# Altium PCB curr_sens_pcb.PcbDoc
Units mil, origin at the board's own origin, x right, y up, seen from the top; angles counter-clockwise.
Board outline 1595 x 1645 mil, 2 copper layers (Top Layer, Bottom Layer); 23 components, 13 nets, 102 pads, 31 vias.
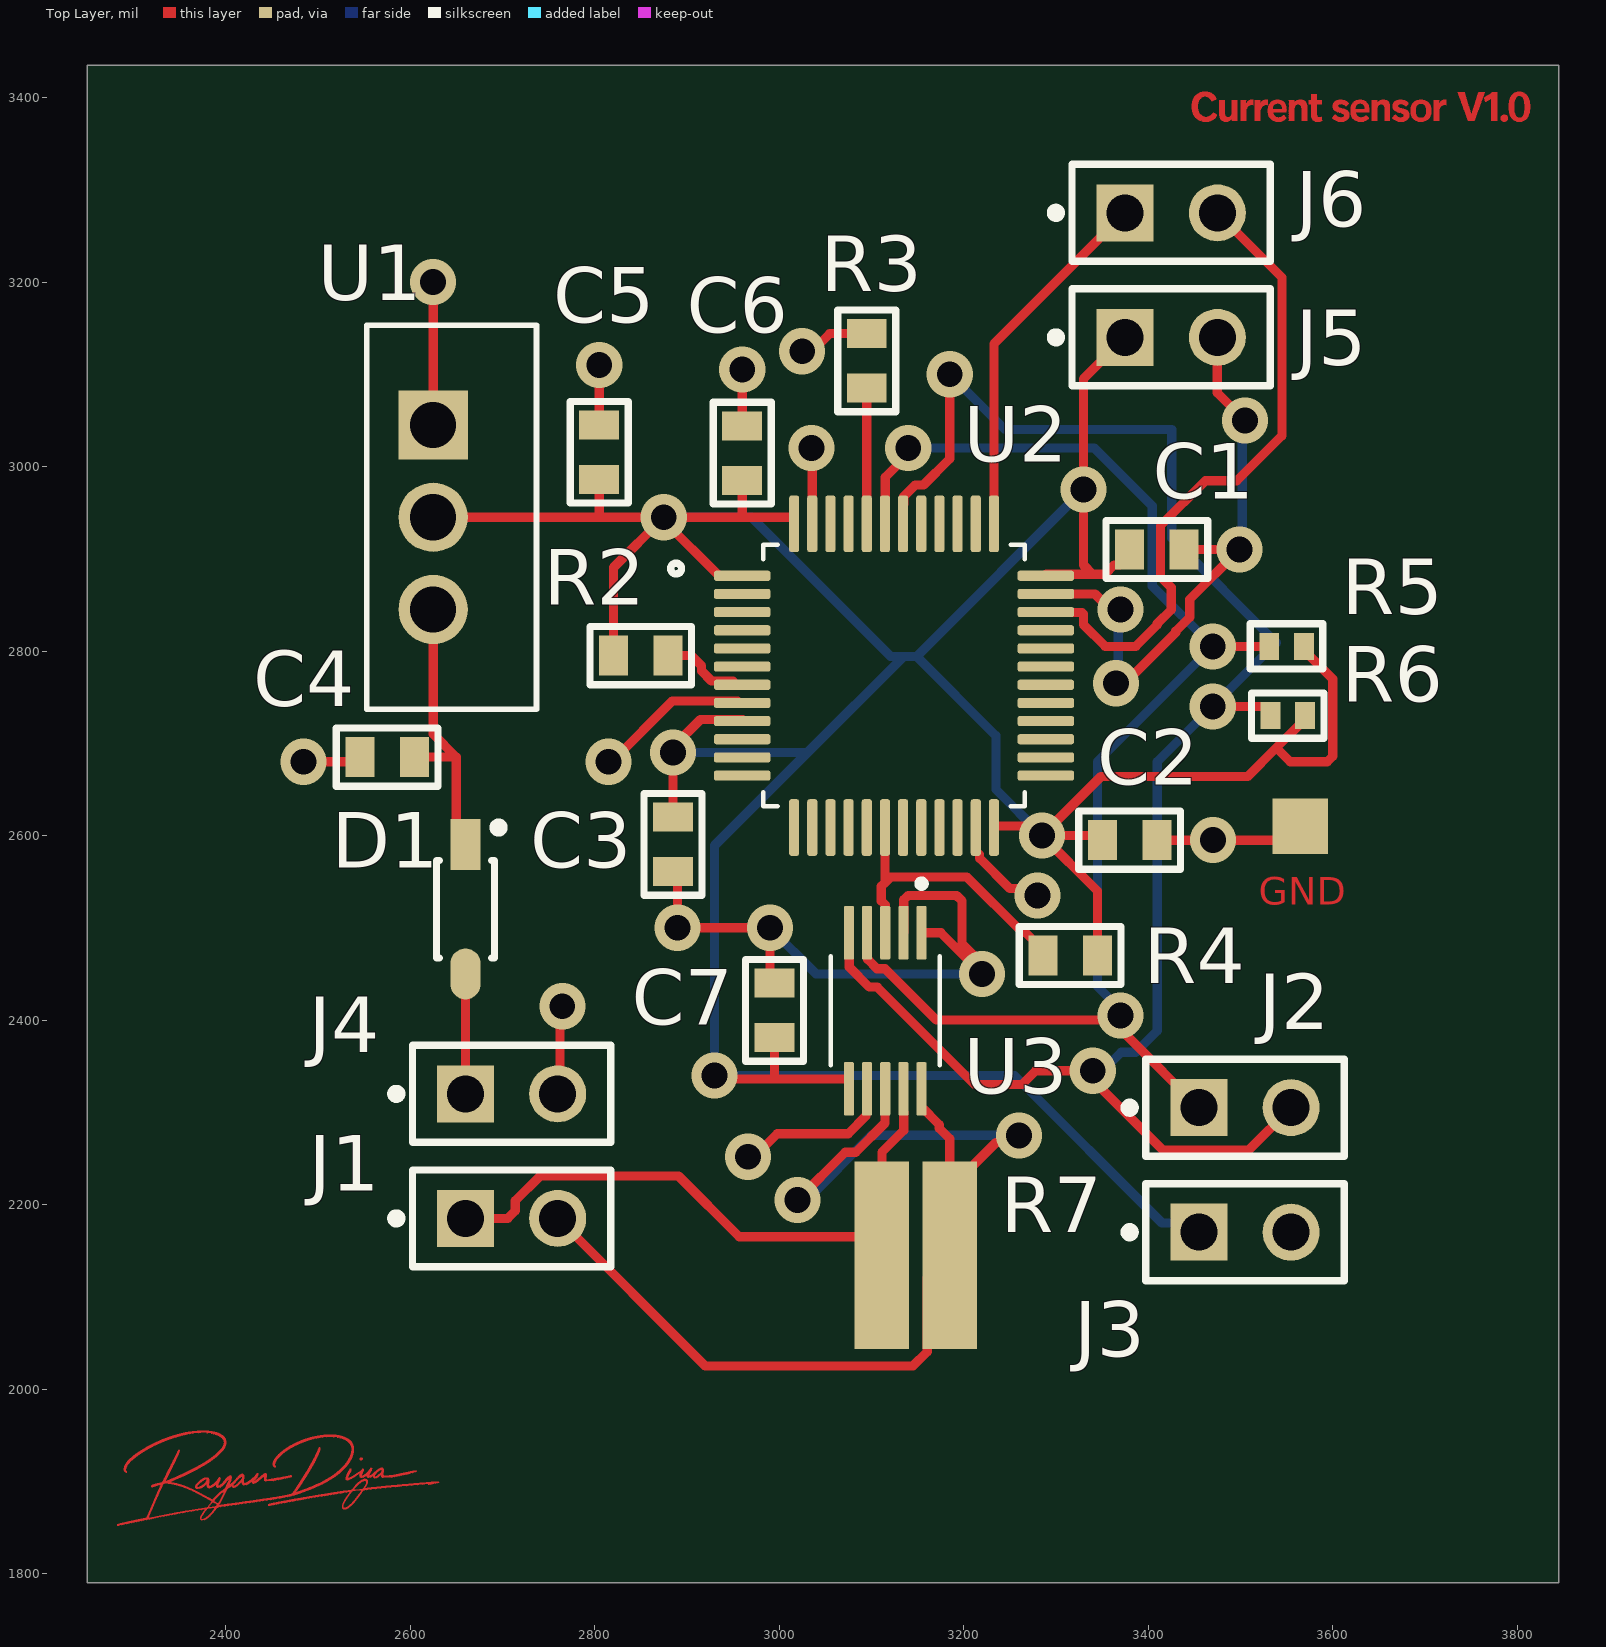
[diagram p0: Top Layer view]
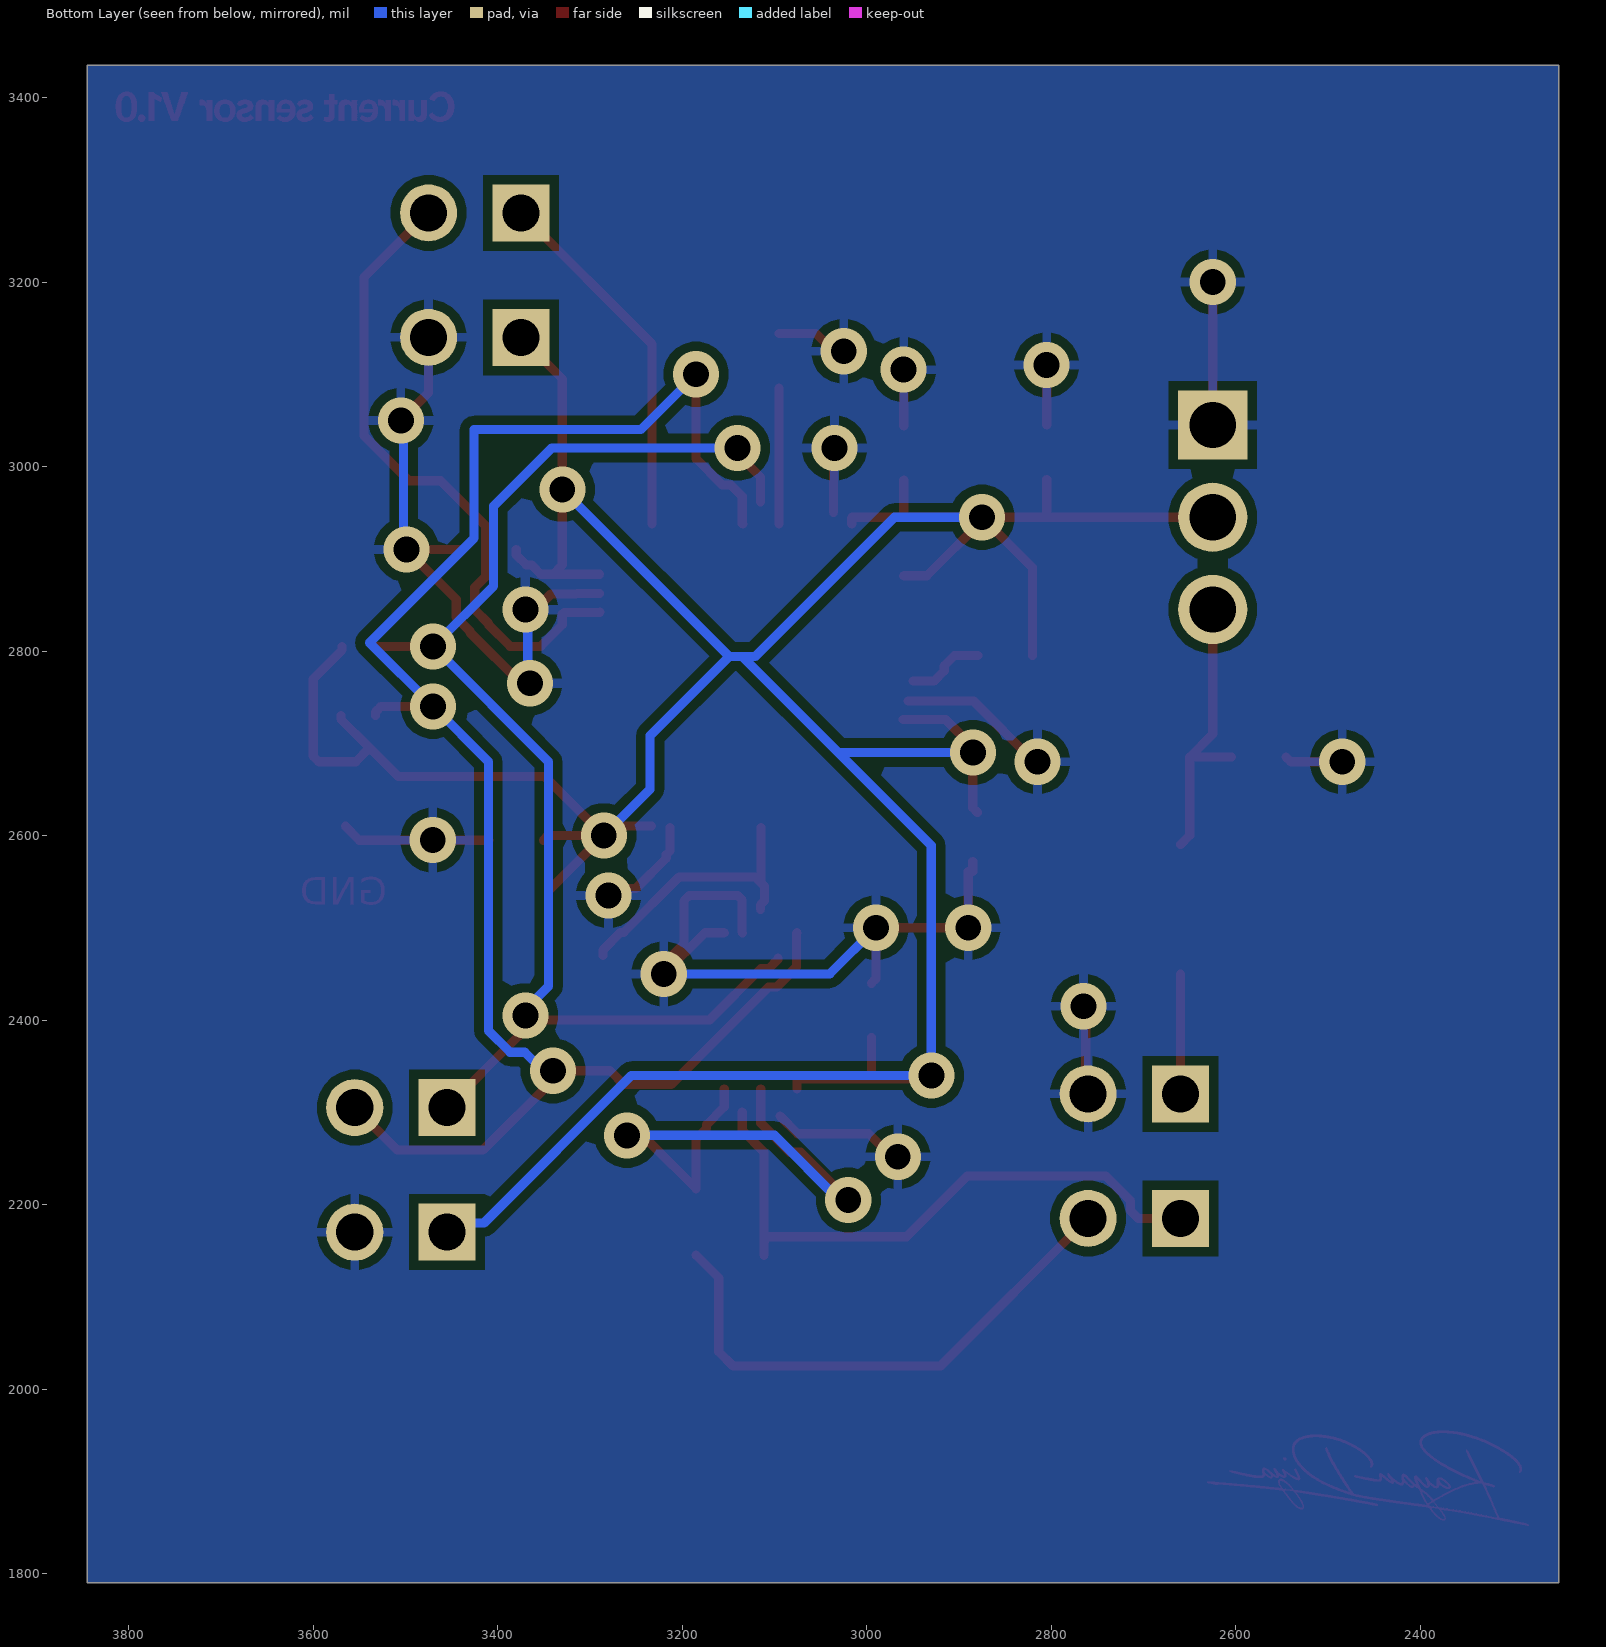
[diagram p1: Bottom Layer view, seen from below]
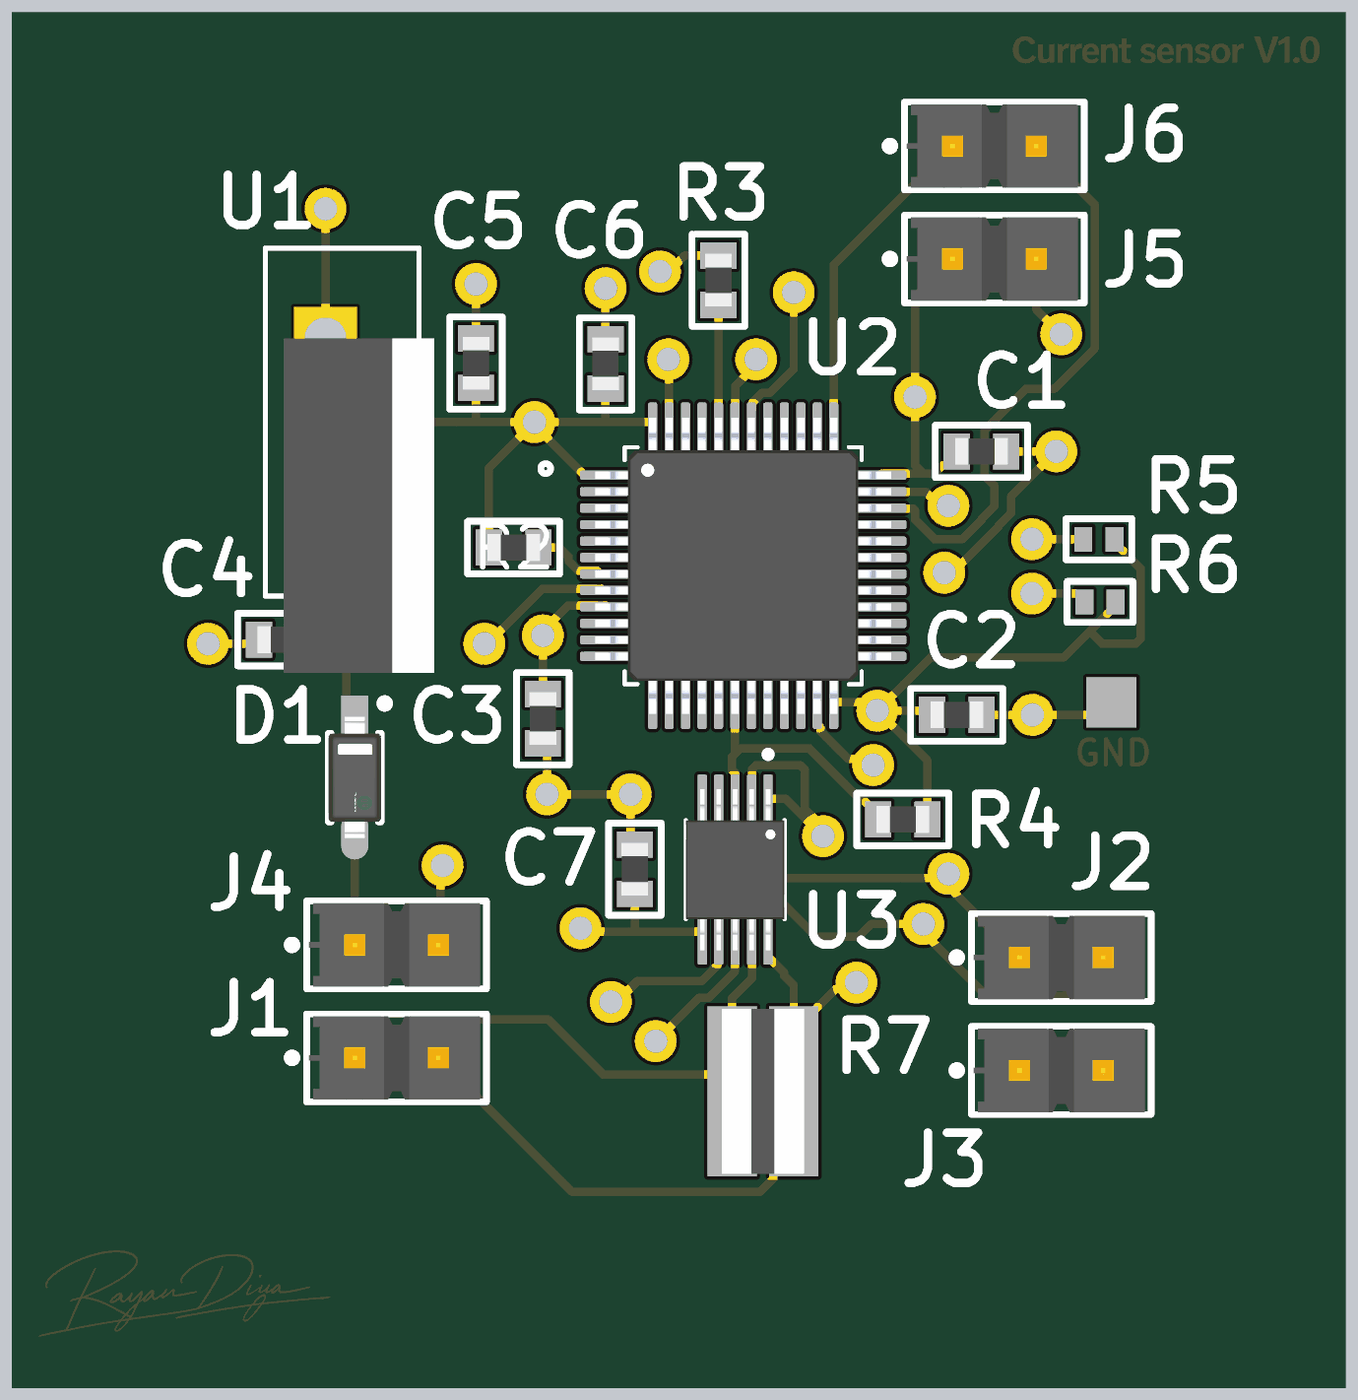
[diagram p2: 3D render of the assembled board from above, using the file's embedded part models]

## Layer stack, top to bottom
Top Solder: solder mask 0.4, Solder Resist, Dk 3.5
Top Layer: signal copper 1.4
Dielectric 1: dielectric 12.6, FR-4, Dk 4.8
Bottom Layer: signal copper 1.4
Bottom Solder: solder mask 0.4, Solder Resist, Dk 3.5

## Board outline
2250,1790 3845,1790 3845,3435 2250,3435

## Design rules (kind name [scope] priority, off if disabled: settings)
Clearance [All] p1: gap=10 ignorepadtopadclearanceinfootprint=TRUE except(5: Arc-SMDPad Track-SMDPad)
PolygonConnect [All] p1: connectstyle=Relief reliefconductorwidth=10 reliefentries=4 polygonreliefangle="90 Angle" airgapwidth=10
RoutingVias [All] p1: holewidth=28 width=50 viastyle="Through Hole" minholewidth=28 minwidth=50 maxholewidth=28 maxwidth=50
SolderMaskExpansion [All] p1: expansion=4 istentingtop=FALSE
SupplyNets "Schematic Supply Nets_2" [InNet('5V0')] p1: voltage=0.000
SupplyNets "Schematic Supply Nets_1" [InNet('GND')] p2: voltage=0.000
SupplyNets "Schematic Supply Nets" [InNet('3V3')] p3: voltage=0.000
Width [All] p1: maxlimit=10 minlimit=10 preferedwidth=10
30 further rules are at their usual default settings.

## Components (designator, comment, footprint, x,y, rotation, side; value= is the part's Value field where it differs from the comment)
C1 "CAP 100nF 50V X7R 10% 0603 CAP" "Standard 0603" 3409.53,2910 r0 top
C2 "CAP 100nF 50V X7R 10% 0603 CAP" "Standard 0603" 3380,2595 r0 top
C3 "CAP 100nF 50V X7R 10% 0603 CAP" "Standard 0603" 2885,2590.47 r270 top
C4 "CAP 10u0 25V X5R 10% 0603" "Standard 0603" 2575,2685 r0 top
C5 "CAP 10u0 25V X5R 10% 0603" "Standard 0603" 2805,3015.47 r270 top
C6 "CAP 100nF 50V X7R 10% 0603 CAP" "Standard 0603" 2960,3014.53 r90 top
C7 "CAP 100nF 50V X7R 10% 0603 CAP" "Standard 0603" 2995,2410.47 r90 top
D1 "MBR0520LT1G" FP-425-04-IPC_A 2660,2520.08 r270 top
J1 "TSW-102-07-F-S" FP-TSW-102-07-F-S-MFG 2710,2185 r0 top
J2 "TSW-102-07-F-S" FP-TSW-102-07-F-S-MFG 3505,2305 r0 top
J3 "TSW-102-07-F-S" FP-TSW-102-07-F-S-MFG 3505,2170 r0 top
J4 "TSW-102-07-F-S" FP-TSW-102-07-F-S-MFG 2710,2320 r0 top
J5 "TSW-102-07-F-S" FP-TSW-102-07-F-S-MFG 3425,3140 r0 top
J6 "TSW-102-07-F-S" FP-TSW-102-07-F-S-MFG 3425,3275 r0 top
R2 "RES 10k 100m 0.1% 0603" "Standard 0603" 2850,2795 r180 top
R3 "RES 10k 100m 0.1% 0603" "Standard 0603" 3095,3114.53 r90 top
R4 "RES 10k 100m 0.1% 0603" "Standard 0603" 3315.47,2470 r180 top
R5 "RK73B1ETTP562J" "Standard 0402" 3550,2805 r180 top
R6 "RK73B1ETTP562J" "Standard 0402" 3551.3,2730 r180 top
R7 "LTR50UZPF2R20" RESC2550X65N 3148.19,2145 r0 top (schematic designator RShunt)
U1 "LM1117T-3.3" TO254P470X1016X2222-3P 2665,2845 r270 top
U2 "STM32F103C8T6" QFP50P900X900X160-48N 3124.57,2773.27 r0 top
U3 "INA228AIDGSR" SOP50P490X110-10N 3115,2410 r270 top

## Footprints (in the part's own frame and the unit in brackets; to place one, negate y for a bottom-side part, rotate by r counter-clockwise, add the part's x,y. Pads: shape width x height; smd on the part's side, far side on the other; paste and mask are expansions set on the pad)
FP-425-04-IPC_A [mm]
  rect 1.408x0.822 smd paste+0 mask+0: 1(-1.78,0)
  rrect100% 1.408x0.822 smd paste+0 mask+0: 2(1.78,0)
  silkscreen extent -2.37,-0.8 1.35,1.04, body extent -2.98,-1.3 2.98,1.3, height 0.25
FP-TSW-102-07-F-S-MFG [mm]
  rect 1.57x1.57 hole 1.02 paste-2539.97 mask+0: 1(-1.27,0)
  round 1.57 hole 1.02 paste-2539.97 mask+0: 2(1.27,0)
  silkscreen extent -3.3,-1.34 2.73,1.34, body extent -2.83,-1.44 2.83,1.44, height 0.25
QFP50P900X900X160-48N [mm]
  rrect50% 1.56x0.28 smd: 1(-4.18,2.75) 2(-4.18,2.25) 3(-4.18,1.75) 4(-4.18,1.25) 5(-4.18,0.75) 6(-4.18,0.25) 7(-4.18,-0.25) 8(-4.18,-0.75) 9(-4.18,-1.25) 10(-4.18,-1.75) 11(-4.18,-2.25) 12(-4.18,-2.75) 25(4.18,-2.75) 26(4.18,-2.25) 27(4.18,-1.75) 28(4.18,-1.25) 29(4.18,-0.75) 30(4.18,-0.25) 31(4.18,0.25) 32(4.18,0.75) 33(4.18,1.25) 34(4.18,1.75) 35(4.18,2.25) 36(4.18,2.75)
  rrect50% 0.28x1.56 smd: 13(-2.75,-4.18) 14(-2.25,-4.18) 15(-1.75,-4.18) 16(-1.25,-4.18) 17(-0.75,-4.18) 18(-0.25,-4.18) 19(0.25,-4.18) 20(0.75,-4.18) 21(1.25,-4.18) 22(1.75,-4.18) 23(2.25,-4.18) 24(2.75,-4.18) 37(2.75,4.18) 38(2.25,4.18) 39(1.75,4.18) 40(1.25,4.18) 41(0.75,4.18) 42(0.25,4.18) 43(-0.25,4.18) 44(-0.75,4.18) 45(-1.25,4.18) 46(-1.75,4.18) 47(-2.25,4.18) 48(-2.75,4.18)
  silkscreen extent -6.15,-3.6 3.6,3.6, body extent -4.5,-4.5 4.5,4.5, height 1.6
RESC2550X65N [mm]
  rect 1.5x5.17 smd: 1(-0.935,0) 2(0.935,0)
  body extent -1.25,-2.5 1.25,2.5, height 0.65
SOP50P490X110-10N [mm]
  rrect25% 1.47x0.28 smd: 1(-2.15,1) 2(-2.15,0.5) 3(-2.15,0) 4(-2.15,-0.5) 5(-2.15,-1) 6(2.15,-1) 7(2.15,-0.5) 8(2.15,0) 9(2.15,0.5) 10(2.15,1)
  silkscreen extent -3.6,-1.5 1.5,1.5, body extent -2.45,-1.5 2.45,1.5, height 1.1
"Standard 0402" [mm] "Standard 0402 Footprint"
  rect 0.55x0.75 smd: 1(-0.475,0) 2(0.475,0)
  silkscreen extent -1,-0.63 1,0.63
"Standard 0603" [mm] "Standard 0603 Footprint"
  rect 0.8x1.1 smd: 1(-0.75,0) 2(0.75,0)
  silkscreen extent -1.4,-0.8 1.4,0.8, body extent -0.8,-0.41 0.8,0.41, height 0.71
TO254P470X1016X2222-3P [mil]
  rect 75x75 / inner round 75 / far side rect 75x75 hole 50: 1(-200,-40)
  round 75 hole 50: 2(-100,-40) 3(0,-40)
  silkscreen extent -308,-112 108,72, body extent -200,-90 200,90, height 770

## Part data
C1 C2 C3 C6 C7: library part CMP-00408-17, "50V 100nF X7R ±10% 0603 Multilayer Ceramic Capacitors MLCC - SMD/SMT ROHS", Capacitance=100nF, JLC Basic Part (Y/N)=Y, JLC Part #=C14663, MPN=CC0603KRX7R9BB104, Package=0603, Temperature Coefficient=X7R, Tolerance=10%, Voltage Rating=50V, Polarized (Y/N)=N
C4 C5: library part CMP-00647-3, "10uF 25V X5R ±10% 0603 Multilayer Ceramic Capacitors MLCC - SMD/SMT ROHS", Capacitance=10µF, JLC Basic Part (Y/N)=N, JLC Part #=C344022, MPN=GRM188R61E106KA73D, Package=0603, Temperature Coefficient=X5R, Tolerance=10%, Voltage Rating=25V, Polarized (Y/N)=N
D1: library part CMP-00516-1, "Diode, Schottky Barrier, Vr 20V, If 0.5A, Pkg SOD-123, Vf 0.385V, Tj +125DEGC, Cs 5.5A", Current Rating=500mA, Forward Voltage=385mV, JLC Basic Part (Y/N)=N, JLCPCB Part #=C23848, Package=SOD-123, Reverse Breakdown Voltage=20V, MPN=MBR0520LT1G
J1 J2 J3 J4 J5 J6: library part CMP-00417-1, "Board Connector, 2 Contact(s), 1 Row(s), Male, Straight, 0.1 inch Pitch, Solder Terminal, Black Insulator", JLC Basic Part (Y/N)=N, JLCPCB Part #=C3331037, Keyed (Y/N)=N, MPN=TSW-102-07-F-S, Num Contacts=2, Polarized? (Y/N)=N
R2 R3 R4: library part CMP-00535-3, "-55℃~+155℃ 100mW 10kΩ 75V Thin Film Resistor ±0.1% ±25ppm/℃ 0603 Chip Resistor - Surface Mount ROHS", JLC Basic Part (Y/N)=N, JLCPCB Part #=C95204, MPN=RT0603BRD0710KL, Package=0603, Power Rating=100mW, Resistance=10k, Tolerance=0.1%, Voltage Rating=75V, Polarized (Y/N)=N
R5 R6: library part CMP-00605-2, "Res Thick Film 0402 5.6K Ohm 5% 0.1W(1/10W) ±200ppm/C Pad SMD Automotive T/R", JLC Basic Part (Y/N)=N, JLCPCB Part #=C131603, Package=0402, Power Rating=63mW, Resistance=5.6k, Tolerance=5%, Voltage Rating=50V, MPN=RK73B1ETTP562J, Polarized (Y/N)=N
R7: "2.2 Ohms Â±1% 1W Chip Resistor Wide 2010 (5025 Metric), 1020 Automotive AEC-Q200, Pulse Withstanding Thick Film", Package="2550 ROHM", Check_prices=https://www.snapeda.com/parts/LTR50UZPF2R20/Rohm/view-part/?ref=eda, MF=Rohm, MP=LTR50UZPF2R20, SnapEDA_Link=https://www.snapeda.com/parts/LTR50UZPF2R20/Rohm/view-part/?ref=snap
U1: "Linear Voltage Regulator IC Positive Fixed 1 Output 800mA TO-220-3", Package="TO-220-3 TEXAS INSTRUMENTS", Availability="In Stock", Check_prices=https://www.snapeda.com/parts/LM1117T-3.3/Texas+Instruments/view-part/?ref=eda, MF="Texas Instruments", MP=LM1117T-3.3, Price=None, Purchase-URL=https://pricing.snapeda.com/search/part/LM1117T-3.3/?ref=eda, SnapEDA_Link=https://www.snapeda.com/parts/LM1117T-3.3/Texas+Instruments/view-part/?ref=snap
U2: "ARM® Cortex®-M3 STM32F1 Microcontroller IC 32-Bit 72MHz 64KB (64K x 8) FLASH 48-LQFP (7x7)", Package="LQFP-48 STMicroelectronics", Check_prices=https://www.snapeda.com/parts/STM32F103C8T6/STMicroelectronics/view-part/?ref=eda, MF=STMicroelectronics, MP=STM32F103C8T6, SnapEDA_Link=https://www.snapeda.com/parts/STM32F103C8T6/STMicroelectronics/view-part/?ref=snap
U3: "85-V, 20-bit, ultra-precise, I2C output current/voltage/power/energy/charge monitor with alert", Package="VSSOP-10 Texas Instruments", Check_prices=https://www.snapeda.com/parts/INA228AIDGSR/Texas+Instruments/view-part/?ref=eda, MF="Texas Instruments", MP=INA228AIDGSR, SnapEDA_Link=https://www.snapeda.com/parts/INA228AIDGSR/Texas+Instruments/view-part/?ref=snap

## Free pads (board coordinates)
  rect 60x60 smd: 3(3565,2610)

## Via types
v1: diameter 50, hole 28, Top Layer to Bottom Layer, 31 vias

## Nets (pads, with @x,y where several pads share a name; then routed paths per layer and width w, separated by ;. In a path a pad name is that pad's centre, name@x,y a point inside that pad or via, vN(x,y) a via of type N, cw(c..) or ccw(c..) an arc to the next point about the centre after c; other vN are vias at no path point)
3V3: C1.1 C2.1 C3.1 C5.2 C6.1 C7.1 J3.1 J5.1 R2.2 R4.1 R5.1 R6.1 U1.2 U2.1 U2.9 U2.24 U2.36 U2.48 U3.6 | length 4458
  Top Layer w10: U1.2 2804.14,2945 ; C5.2 2805,2945.86 2804.14,2945 ; R2.2 2820.47,2890.47 v1(2875,2945) ; C3.1@2880,2625 2885,2630 2885,2696.06 2914.72,2725.79 U2.9@2960.43,2725.79 ; v1(2930,2340) 2934.06,2335.94 2995,2335.94 ; U2.1 2934.8,2881.54 2875,2941.34 v1(2875,2945) ; C6.1 2960,2945 ; C7.1 2995,2335.94 ; U2.48 3016.3,2944.49 3015.79,2945 2960,2945 ; U3.6 3075.63,2335.43 3075.12,2335.94 2995,2335.94 ; U2.24@3233.27,2610.43 3263.74,2610.43 3274.18,2600 v1(3285,2600) ; U2.36@3289.57,2883.27 3340,2883.27 ; R4.1 3345,2540 v1(3285,2600) ; C2.1 3345.47,2600 v1(3285,2600) ; J5.1 3330,3095 v1(3330,2975) 3330,2893.27 3340,2883.27 ; C1.1 3380,2904.09 3369.25,2893.35 3363.35,2893.35 3353.27,2883.27 3340,2883.27 ; R5.1 3568.7,2801.06 3600,2769.76 3600,2685.86 3594.14,2680 3553.95,2680 3538.94,2695 ; R6.1 3570,2726.06 3538.94,2695 ; 2804.14,2945 v1(2875,2945) ; v1(2875,2945) 2960,2945 ; v1(3285,2600) 3348.94,2663.94 3507.88,2663.94 3538.94,2695
  Bottom Layer w10: v1(2875,2945) 2970,2945 3120.86,2794.14 3135,2794.14 ; v1(2885,2690) 3030.86,2690 ; v1(3285,2600) 3235,2650 3235,2708.28 3149.14,2794.14 ; v1(3330,2975) 3149.14,2794.14 ; J3.1 3444.95,2180.05 3414.95,2180.05 3255,2340 v1(2930,2340) 2930,2589.14 3030.86,2690 ; 3030.86,2690 3135,2794.14 ; 3135,2794.14 3149.14,2794.14
5V0: D1.2 J4.1 | length 130
  Top Layer w10: J4.1 D1.2
"Alert PB0": R4.2 U2.18 U3.3 | length 304.6
  Top Layer w10: U2.18 3114.72,2548.87 ; U3.3@3115.2,2520 3115.2,2524.8 3110.83,2529.17 3110.83,2544.97 3114.72,2548.87 ; R4.2 3285.94,2475.91 3266.85,2495 3263.43,2495 3203.43,2555 3120.86,2555 3114.72,2548.87
GND: C1.2 C2.2 C3.2 C4.1 C5.1 C6.2 C7.2 J3.2 J4.2 J5.2 pad.3 R3.2 U1.1 U2.8 U2.23 U2.35 U2.47 U3.1 U3.2 U3.7 | length 2630.3
  Top Layer w10: v1(2484.53,2680) 2540.47,2680 C4.1 ; U1.1 v1(2625,3200) ; J4.2 2762.5,2322.5 2762.5,2412.5 v1(2765,2415) ; C5.1 v1(2805,3110) ; v1(2815,2680) 2818.43,2680 2884.22,2745.79 U2.8@2955,2745.79 ; C3.2 C3.2@2885,2571.89 ; C3.2@2890,2560.94 v1(2890,2500) v1(2990,2500) 2990,2445 C7.2 ; C6.2 v1(2960,3105) ; v1(2966.33,2251.83) 2973.03,2251.83 2997.96,2276.77 3074.83,2276.77 3094.03,2295.97 ; v1@3032.65,3132.65 v1(3025,3125) 3035.82,3125 3054.88,3144.06 R3.2 ; v1(3035,3020) 3035.98,3019.02 U2.47@3035.98,2950.32 ; U3.2 3135.2,2495.16 3135.2,2530.33 3139.87,2535 3192.35,2535 3198.2,2529.14 3198.2,2482.62 3220,2460.82 v1(3220,2450) 3175.35,2494.65 U3.1 ; U2.23 3213.15,2583.5 3217.32,2579.33 3217.32,2575.46 3250.13,2542.65 3272.35,2542.65 v1(3280,2535) ; U2.35@3289.57,2862.36 3314.33,2862.36 3314.84,2861.85 3342.33,2861.85 3359.18,2845 v1(3370,2845) ; v1(3365,2765) 3374.85,2765 3430,2820.15 3430,2821.57 3445,2836.57 3445,2855.94 v1(3499.06,2910) C1.2 ; C2.2 v1(3470.47,2595) 3550,2595 pad.3 ; J5.2 3475,3080 v1(3505,3050)
  Bottom Layer w10: v1(2990,2500) 3040,2450 v1(3220,2450) ; v1(3365,2765) 3367.5,2767.5 3367.5,2842.5 v1(3370,2845) ; v1(3499.06,2910) 3502.03,2912.97 3502.03,3047.03 v1(3505,3050)
NetC4_2: C4.2 D1.1 U1.3 | length 314.8
  Top Layer w10: C4.2 2650,2685 ; U1.3 2625,2710 2650,2685 ; D1.1 2650,2600.16 2650,2685
NetR2_1: R2.1 U2.7 | length 85.1
  Top Layer w10: R2.1 2905,2795 2915.88,2784.12 2915.88,2778.48 2926.76,2767.6 U2.7@2950,2767.6
NetR3_1: R3.1 U2.44 | length 147.2
  Top Layer w10: R3.1 R3.1 U2.44
SCLBUS: J2.2 R6.2 U2.42 U3.5 | length 1998.7
  Top Layer w10: U3.5 3076.14,2494.13 3076.14,2457.44 3097.87,2435.71 3106.47,2435.71 3212.18,2330 3263.18,2330 3278.18,2345 v1(3340,2345) 3340,2335 3415.91,2259.09 3509.09,2259.09 J2.2 ; U2.42 3134.92,2938.35 3134.92,2959.36 3135.04,2959.48 3135.04,2967.53 3147.51,2980 3156.57,2980 3185,3008.43 v1(3185,3100) ; v1(3470,2740) 3522.6,2740 3522.83,2739.76 3526.77,2739.76 3532.6,2733.94 R6.2
  Bottom Layer w10: v1(3185,3100) 3245,3040 3425.62,3040 3425.62,2922.49 3539.06,2809.06 v1(3470,2740) 3410,2680 3410,2388.43 3386.57,2365 3370.82,2365 3350.82,2345 v1(3340,2345)
SDABUS: J2.1 R5.2 U2.43 U3.4 | length 1501.4
  Top Layer w10: U3.4@3096.14,2466.86 3096.14,2465.72 3106.15,2455.71 3114.75,2455.71 3170.46,2400 3365,2400 v1(3370,2405) 3377.65,2397.35 3377.65,2382.35 J2.1 ; U2.43@3115.04,2961.62 3115.04,2988.39 3140,3013.35 v1(3140,3020) ; v1(3470,2805) R5.2
  Bottom Layer w10: v1(3140,3020) 3341.57,3020 3404.46,2957.11 3404.46,2870.54 v1(3470,2805) 3345,2680 3345,2436.57 3370,2411.57 v1(3370,2405)
SENSWIRE+: J1.2 R7.2 U3.8 U3.10 | length 1242.9
  Top Layer w10: J1.2 2920,2025 3145,2025 3160.47,2040.47 3160.47,2120.47 R7.2 ; v1(3020,2205) 3071.77,2256.77 3083.12,2256.77 3114.8,2288.46 3114.8,2301.42 3115,2301.61 U3.8 ; U3.10 3154.37,2305.86 3173.62,2286.6 3173.62,2282.68 3185,2271.3 3185,2217.24 3235.1,2267.35 3252.35,2267.35 v1(3260,2275)
  Bottom Layer w10: v1(3020,2205) 3030,2205 3100,2275 v1(3260,2275)
SENSWIRE-: J1.1 R7.1 U3.9 | length 670.7
  Top Layer w10: J1.1 2705.91,2185 2714.09,2193.19 2714.09,2204.01 2740.99,2230.91 2890.97,2230.91 2956.87,2165 3106.85,2165 R7.1@3111.38,2160.47 ; R7.1 R7.1@3111.38,2160.47 ; U3.9@3135,2300 3135,2280.37 3111.38,2256.75 R7.1@3111.38,2160.47
SWDCLK: J6.1 U2.37 | length 396.1
  Top Layer w10: U2.37 3232.83,3132.83 J6.1
SWDIO: J6.2 U2.34 | length 713.8
  Top Layer w10: U2.34 3289.65,2841.65 3328.31,2841.65 3329.96,2840 3329.96,2828.47 3353.43,2805 3386.57,2805 3410,2828.43 3410,2829.85 3425,2844.85 3425,2868.77 3413.31,2880.46 3413.31,2935.8 3462.13,2984.61 3496.18,2984.61 3545,3033.43 3545,3205 J6.2
pads on no net: U2.2 U2.3 U2.4 U2.5 U2.6 U2.10 U2.11 U2.12 U2.13 U2.14 U2.15 U2.16 U2.17 U2.19 U2.20 U2.21 U2.22 U2.25 U2.26 U2.27 U2.28 U2.29 U2.30 U2.31 U2.32 U2.33 U2.38 U2.39 U2.40 U2.41 U2.45 U2.46

## Polygon pours and split planes (outlines as drawn)
GND on Bottom Layer "GND_L02_P002" (solid, pour order 2): 2250,3435 2250,1790 3845,1790 3845,3435

## Other copper
Top Layer:
  drawing of 21 lines, arcs and shapes, not listed
  text "GND" at 3520,2525 h30